# Altium PCB TataconUSB.PcbDoc
Units mm, origin at the board's own origin, x right, y up, seen from the top; angles counter-clockwise.
Board outline 16.26 x 32.66 mm, 2 copper layers (Top Layer, Bottom Layer); 17 components, 19 nets, 87 pads, 14 vias.
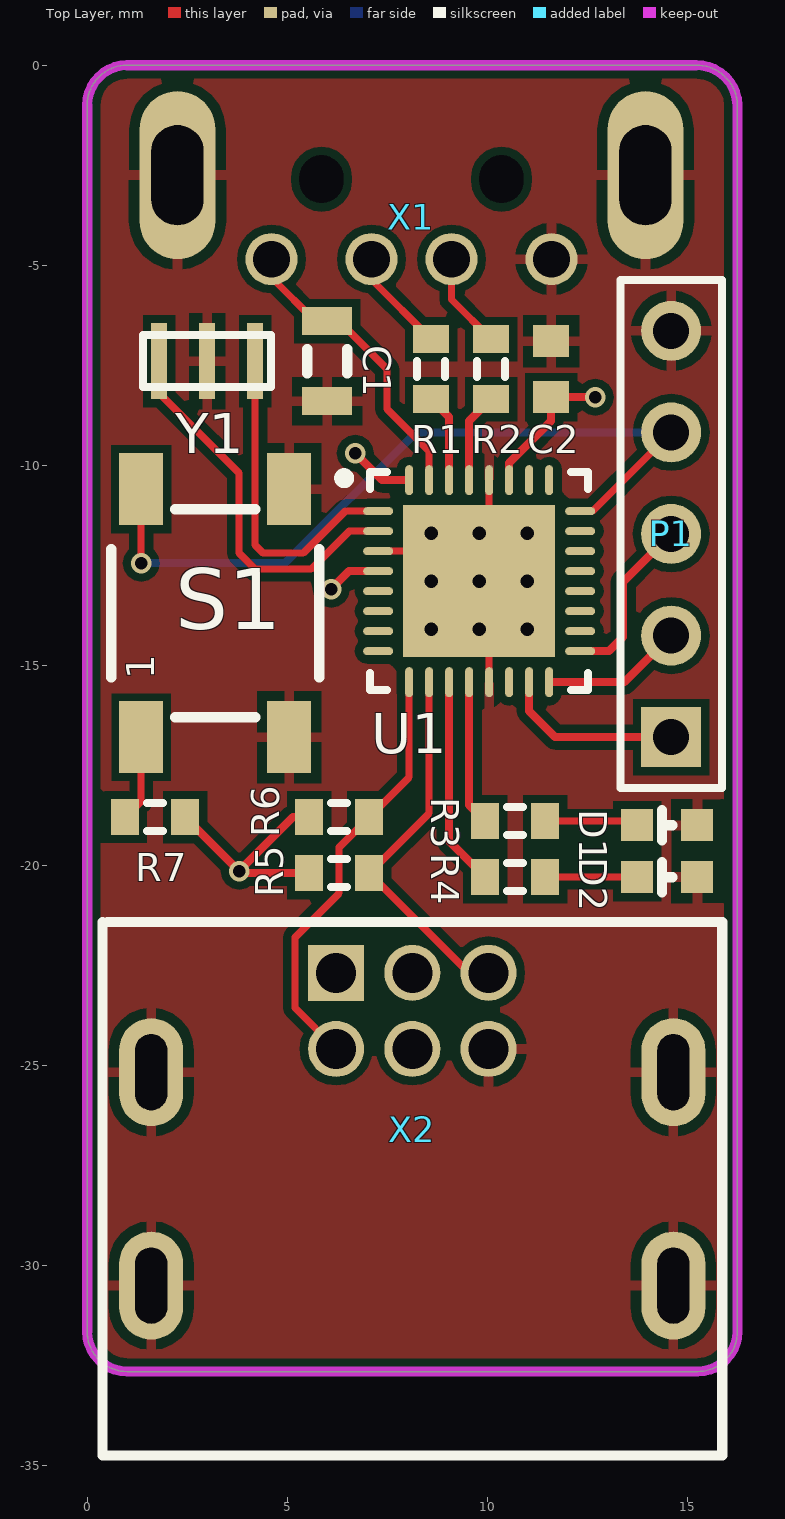
[diagram p0: Top Layer view]
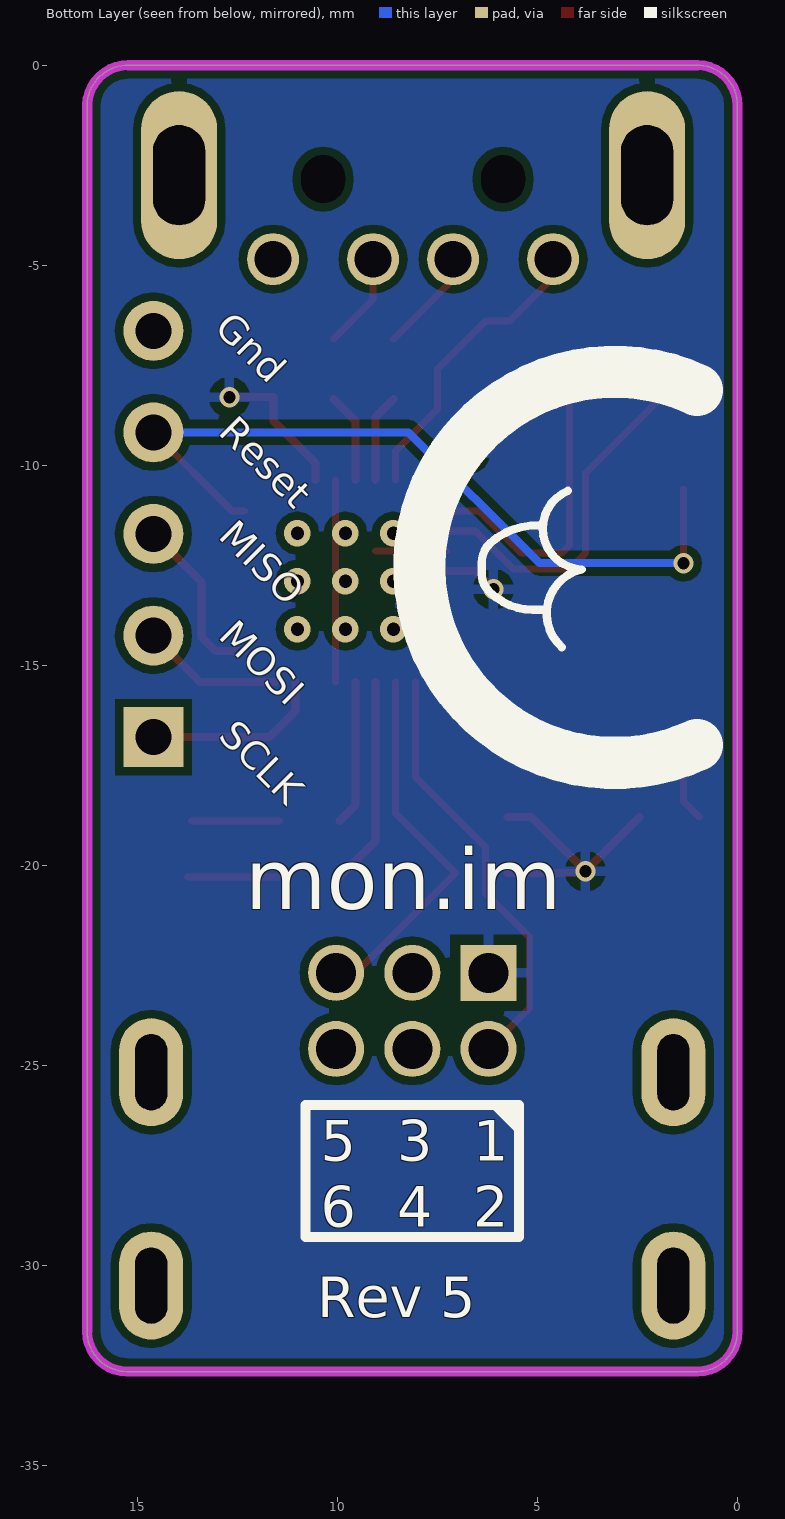
[diagram p1: Bottom Layer view, seen from below]

## Layer stack, top to bottom
Top Solder: solder mask 0.0102, Solder Resist, Dk 3.5
Top Layer: signal copper 0.0356
Dielectric1: dielectric 0.32, FR-4, Dk 4.8
Bottom Layer: signal copper 0.0356
Bottom Solder: solder mask 0.0102, Solder Resist, Dk 3.5

## Board outline
1,-32.66 cw(c1,-31.66) 0,-31.66 0,-1 cw(c1,-1) 1,0 15.216,0 cw(c15.236,-1.02) 16.256,-1 16.256,-31.66 cw(c15.256,-31.66) 15.256,-32.66

## Design rules (kind name [scope] priority, off if disabled: settings)
Clearance [All] p1: gap=0.203
PolygonConnect [All] p1: connectstyle=Relief reliefconductorwidth=0.254 reliefentries=4 polygonreliefangle="90 Angle" airgapwidth=0.254
RoutingVias [All] p1: holewidth=0.4 width=0.5 viastyle="Through Hole" minholewidth=0.3 minwidth=0.4 maxholewidth=6.35 maxwidth=6.4
SolderMaskExpansion [All] p1: expansion=0.102
Width [All] p1: maxlimit=0.635 minlimit=0.178 preferedwidth=0.254 bottomlayer_minwidth=0.203 minimp=50.000000 maximp=50.000000 favimp=50.000000
29 further rules are at their usual default settings.

## Components (designator, comment, footprint, x,y, rotation, side; value= is the part's Value field where it differs from the comment)
C1 "Filter" 0805 6,-7.4 r270 top
C2 "Cap Semi" 1608[0603] 11.6,-7.6 r90 top
D1 "Center" LED_0603 14.5,-19 r180 top
D2 "Rim" LED_0603 14.5,-20.3 r180 top
P1 "Header 5" HDR1X5 14.6,-16.8 r90 top
R1 "Res3" J1-0603 8.6,-7.6 r270 top
R2 "Res3" J1-0603 10.1,-7.6 r270 top
R3 "Res3" J1-0603 10.7,-18.9 r180 top
R4 "Res3" J1-0603 10.7,-20.3 r180 top
R5 "Res3" J1-0603 6.3,-20.2 r180 top
R6 "Res3" J1-0603 6.3,-18.8 r180 top
R7 "" J1-0603 1.7,-18.8 r0 top
S1 "SW-PB" SKQGADE010 3.2,-13.7 r90 top
U1 "ATmega16U2-MU" 32PG_N 9.8,-12.9 r0 top
X1 "USB Connector" USB_A_MALE 8.108,-3.8 r180 top
X2 "Nunchuck" NUNCHUCK 8.128,-26.6 r0 top
Y1 "Resonator" RESONATOR 3,-7.4 r180 top

## Footprints (in the part's own frame and the unit in brackets; to place one, negate y for a bottom-side part, rotate by r counter-clockwise, add the part's x,y. Pads: shape width x height; smd on the part's side, far side on the other; paste and mask are expansions set on the pad)
32PG_N [mm] "QFN, 32-Leads, Body 5x5mm, Pitch 0.5mm, IPC Medium Density"
  oval 0.75x0.2 smd: 1(-2.525,1.75) 2(-2.525,1.25) 3(-2.525,0.75) 4(-2.525,0.25) 5(-2.525,-0.25) 6(-2.525,-0.75) 7(-2.525,-1.25) 8(-2.525,-1.75) 17(2.525,-1.75) 18(2.525,-1.25) 19(2.525,-0.75) 20(2.525,-0.25) 21(2.525,0.25) 22(2.525,0.75) 23(2.525,1.25) 24(2.525,1.75)
  oval 0.2x0.75 smd: 9(-1.75,-2.525) 10(-1.25,-2.525) 11(-0.75,-2.525) 12(-0.25,-2.525) 13(0.25,-2.525) 14(0.75,-2.525) 15(1.25,-2.525) 16(1.75,-2.525) 25(1.75,2.525) 26(1.25,2.525) 27(0.75,2.525) 28(0.25,2.525) 29(-0.25,2.525) 30(-0.75,2.525) 31(-1.25,2.525) 32(-1.75,2.525)
  rect 3.8x3.8 smd: 33(0,0)
  silkscreen extent -3.5,-2.73 2.73,2.73, body extent -2.58,-2.58 2.58,2.58, height 1
0805 [mm]
  rect 0.7x1.25 smd: 1(-1,0) 2(1,0)
  silkscreen extent -0.3,-0.5 0.3,0.5, body extent -1,-0.63 1,0.63, height 0.8
1608[0603] [mm] "Chip Capacitor, Body 1.6x0.8mm, IPC High Density"
  rect 0.8x0.9 smd: 1(-0.7,0) 2(0.7,0)
  body extent -0.87,-0.48 0.87,0.48, height 1.3
HDR1X5 [mm] "Connector; Header; 5 Position"
  rect 1.5x1.5 hole 0.9: 1(0,0)
  round 1.5 hole 0.9: 2(2.54,0) 3(5.08,0) 4(7.62,0) 5(10.16,0)
  silkscreen extent -1.27,-1.27 11.43,1.27
J1-0603 [mm] "Chip Resistor, Body 1.6x0.8mm, IPC High Density"
  rect 0.7x0.9 smd: 1(-0.75,0) 2(0.75,0)
  silkscreen extent -0.2,-0.35 0.2,0.35, body extent -0.85,-0.48 0.85,0.48, height 0.9
LED_0603 [mm]
  rect 0.8x0.8 smd: 1(0.75,0) 2(-0.75,0)
  silkscreen extent -0.13,-0.38 0.13,0.38
NUNCHUCK [mm]
  rect 1.4x1.4 hole 1: 1(-1.905,3.91)
  round 1.4 hole 1: 2(-1.905,2.005) 3(0,3.91) 4(0,2.005) 5(1.905,3.91) 6(1.905,2.005)
  oval 1.6x2.7 hole 0.8 slot 1.9 at 90 deg: 6(-6.528,-3.91) 6(-6.528,1.424) 6(6.528,1.424) 6(6.528,-3.91)
  silkscreen extent -7.75,-8.16 7.75,5.18, body extent -7.39,-8.18 7.39,4.52, height 8.4
RESONATOR [mm]
  rect 0.4x1.9 smd: 1(1.2,0) 2(0,0) 3(-1.2,0)
  silkscreen extent -1.6,-0.65 1.6,0.65
SKQGADE010 [mm]
  rect 1.8x1.1 smd: 1(-3.1,1.85) 1(3.1,1.85) 2(-3.1,-1.85) 2(3.1,-1.85)
  silkscreen extent -2.6,-2.6 2.6,2.6
USB_A_MALE [mm]
  round 1.3 hole 0.92: 1(3.5,1.05) 2(1,1.05) 3(-1,1.05) 4(-3.5,1.05)
  oval 1.9x4.2 hole 1.3 slot 2.5 at 90 deg: 4(-5.85,-1.05) 4(5.85,-1.05)
  round 0 hole 1.1 slot 1.2 at 90 deg unplated: ""(-2.25,-0.95) ""(2.25,-0.95)
  Keep-Out Layer lines w0.254: 6,-3.8 -6,-3.8
  body extent -6.35,-18.85 6.35,1.18, height 3.09

## Part data
C1: library part "Cap Semi", "Capacitor (Semiconductor SIM Model)"
C2: "Capacitor (Semiconductor SIM Model)"
D1 D2: library part LED2, "Typical RED, GREEN, YELLOW, AMBER GaAs LED"
P1: "Header, 5-Pin"
R1 R2 R3 R4 R5 R6: "Resistor"
R7: library part Res3, "Resistor"
S1: "Switch"
U1: "8-bit AVR Microcontroller, 2.7-5.5V, 16KB Flash, 512 Bytes EEPROM, 512 Bytes SRAM, 32-pin VQFN, Industrial Grade (-40°C to 85°C)"

## Free pads (board coordinates)
  round 1.5 on Bottom Overlay: 0(2.5,-10.4) 1(2.5,-14.7)

## Via types
v1: diameter 0.66, hole 0.33, Top Layer to Bottom Layer, tented top, 9 vias
v2: diameter 0.505, hole 0.305, Top Layer to Bottom Layer, 5 vias

## Nets (pads, with @x,y where several pads share a name; then routed paths per layer and width w, separated by ;. In a path a pad name is that pad's centre, name@x,y a point inside that pad or via, vN(x,y) a via of type N, cw(c..) or ccw(c..) an arc to the next point about the centre after c; other vN are vias at no path point)
CENTERLED: R3.2 U1.12 | length 3.6
  Top Layer w0.203: U1.12 9.55,-18.5 R3.2
GND: C1.2 C2.2 D1.2 D2.2 P1.5 S1.2 U1.3 U1.13 U1.28 U1.33 X1.4 X2.6 Y1.2 | length 6.3
  Top Layer w0.178: U1.3 U1.33@9.05,-12.15 ; U1.13 U1.33@10.05,-13.15 ; U1.33@10.05,-12.65 U1.28
  other v1: 8.6,-14.1 9.8,-14.1 11,-14.1 8.6,-12.9 9.8,-12.9 11,-12.9 8.6,-11.7 9.8,-11.7 11,-11.7
MISO: P1.3 U1.17 | length 4.3
  Top Layer w0.203: U1.17 13.05,-14.65 13.4,-14.3 13.4,-12.92 P1.3
MOSI: P1.2 U1.16 | length 3.5
  Top Layer w0.203: U1.16 13.435,-15.425 P1.2
NetD1_1: D1.1 R3.1 | length 2.2
  Top Layer w0.178: R3.1 D1.1@13.65,-18.9
NetD2_1: D2.1 R4.1 | length 2.3
  Top Layer w0.178: R4.1 D2.1
NetR1_1: R1.1 X1.2 | length 2.6
  Top Layer w0.178: X1.2 7.108,-5.358 R1.1
NetR1_2: R1.2 U1.30 | length 2.2
  Top Layer w0.203: R1.2 9.05,-8.8 U1.30
NetR2_1: R2.1 X1.3 | length 2.4
  Top Layer w0.178: X1.3 9.108,-5.858 R2.1
NetR2_2: R2.2 U1.29 | length 2.3
  Top Layer w0.203: U1.29 9.55,-8.9 R2.2
NetR5_1: R5.1 U1.10 X2.5 | length 9.4
  Top Layer w0.178: U1.10 8.55,-18.7 R5.1 9.54,-22.69 X2.5
NetR6_1: R6.1 U1.9 X2.2 | length 11.2
  Top Layer w0.178: X2.2@5.795,-24.595 X2.2 5.2,-23.572 5.2,-21.8 6.3,-20.7 6.3,-19.55 R6.1 8.05,-17.8 U1.9
NetU1_1: U1.1 Y1.3 | length 8.2
  Top Layer w0.178: Y1.3 4.2,-12 4.4,-12.2 5.4,-12.2 6.45,-11.15 U1.1
NetU1_2: U1.2 Y1.1 | length 8.9
  Top Layer w0.178: Y1.1@1.8,-8.2 3.8,-10.2 3.8,-12.2 4.2,-12.6 5.6,-12.6 6.55,-11.65 U1.2
RESET: P1.4 R7.1 S1.1 U1.24 | length 21.7
  Top Layer w0.178: R7.1 1.35,-18.4 S1.1@1.35,-16.8 ; v2(1.35,-12.45) S1.1@1.35,-10.6 ; U1.24 12.63,-11.15 P1.4
  Bottom Layer w0.203: v2(1.35,-12.45) 4.95,-12.45 8.22,-9.18 P1.4
RIMLED: R4.2 U1.11 | length 5.2
  Top Layer w0.203: U1.11 9.05,-19.4 R4.2
SCLK: P1.1 U1.15 | length 4.5
  Top Layer w0.203: U1.15 11.05,-16.15 11.7,-16.8 P1.1
UVCC: C1.1 U1.31 X1.1 | length 7.5
  Top Layer w0.178: X1.1 4.608,-5.308 5.7,-6.4 C1.1 6.3,-6.4 7.5,-7.6 7.5,-8.6 8.55,-9.65 U1.31
VCC: C2.1 R5.2 R6.2 R7.2 U1.4 U1.27 U1.32 X2.1 | length 13
  Top Layer w0.203: R7.2 v2(3.8,-20.15) ; R5.2@5.75,-20.2 3.85,-20.2 v2(3.8,-20.15) ; R6.2@5.75,-18.8 5.15,-18.8 v2(3.8,-20.15) ; v2(6.1,-13.1) 6.55,-12.65 U1.4 ; v2(6.7,-9.7) 7.375,-10.375 U1.32 ; U1.27 10.55,-9.95 11.6,-8.9 C2.1 v2(12.7,-8.3)
pads on no net: U1.5 U1.6 U1.7 U1.8 U1.14 U1.18 U1.19 U1.20 U1.21 U1.22 U1.23 U1.25 U1.26 X1. X2.3 X2.4

## Polygon pours and split planes (outlines as drawn)
GND on Top Layer "Gnd" (solid, pour order 5): 0,0 16.256,0 16.256,-32.66 0,-32.66
VCC on Bottom Layer "Vcc" (solid, pour order 7): 0,0 16.256,0 16.256,-32.66 0,-32.66

## Keep-outs
Keep-Out Layer:
  the board outline again, w0.254

## Silkscreen, mask and mechanical layers (free items; w line width, h text height)
Bottom Overlay:
  lines w0.207: 4.235,-10.641 cw(c3.845,-11.585) 3.89,-12.606 cw(c3.64,-13.707) 4.39,-14.551 ; 4.846,-13.617 5.108,-13.617 ccw(c5.108,-12.088) 6.189,-13.169 ; 4.935,-11.5 cw(c4.987,-13.322) 6.184,-11.948 cw(c5.68,-12.452) 6.393,-12.452 6.393,-12.722 cw(c5.803,-12.722) 6.22,-13.139
  lines w1.303: 1.008,-8.117 cw(c3.062,-12.554) 1.011,-16.993
  text "Gnd" at 13.1,-6.6 h0.7 r45
  text "Reset" at 13,-9.2 h0.7 r45
  text "MISO" at 13,-11.8 h0.7 r45
  text "MOSI" at 13,-14.3 h0.7 r45
  text "SCLK" at 13,-16.8 h0.7 r45
  text "mon.im" at 12.3,-21.1 h1.52
  text "Rev 5" at 10.5,-31.3 h1.02

## Text inside footprints (layer, text, board x,y; h text height)
S1: Top Overlay "1" at 1.676,-15.351 h0.7 r90
X2: Bottom Overlay "2" at 6.604,-29.04 h1.02; Bottom Overlay "4" at 8.509,-29.04 h1.02; Bottom Overlay "6" at 10.414,-29.04 h1.02; Bottom Overlay "1" at 6.604,-27.389 h1.02; Bottom Overlay "3" at 8.509,-27.389 h1.02; Bottom Overlay "5" at 10.414,-27.389 h1.02